# Altium PCB PCB1.PcbDoc
Units mm, origin at the board's own origin, x right, y up, seen from the top; angles counter-clockwise.
Board outline 151.89 x 92.35 mm, 2 copper layers (Top Layer, Bottom Layer); 104 components, 94 nets, 370 pads, 84 vias.
Unrouted connection lines stored in the file: 8.
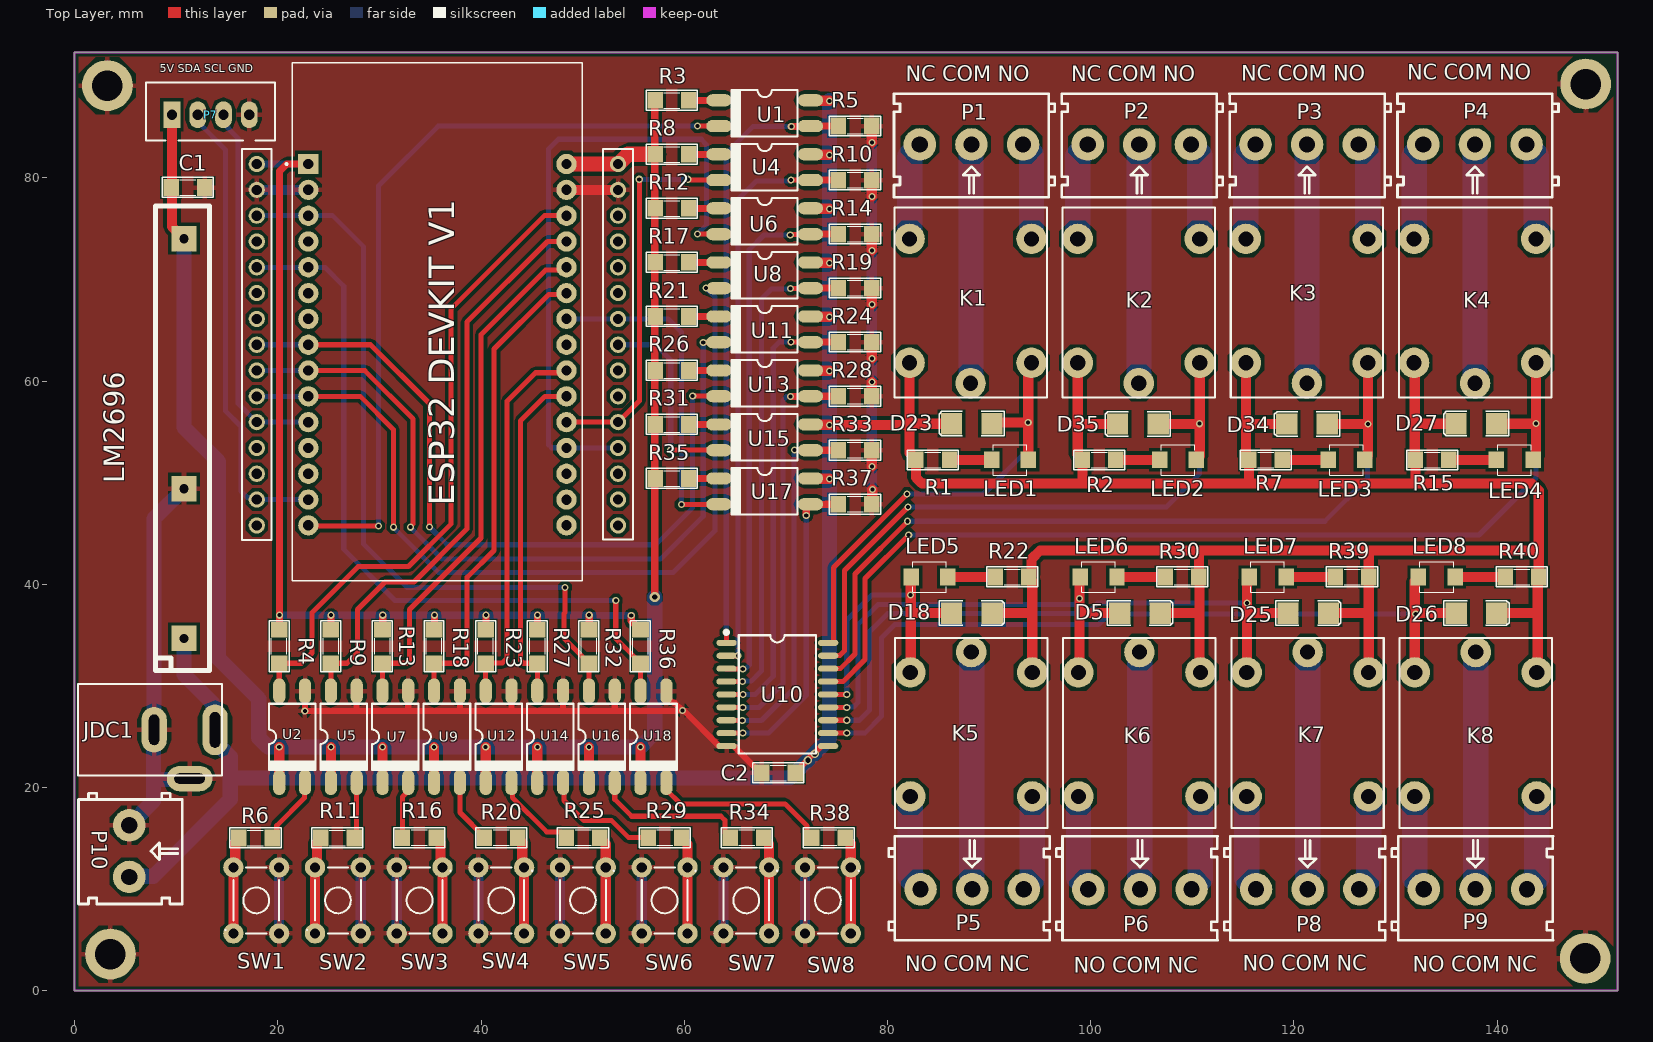
[diagram p0: Top Layer view]
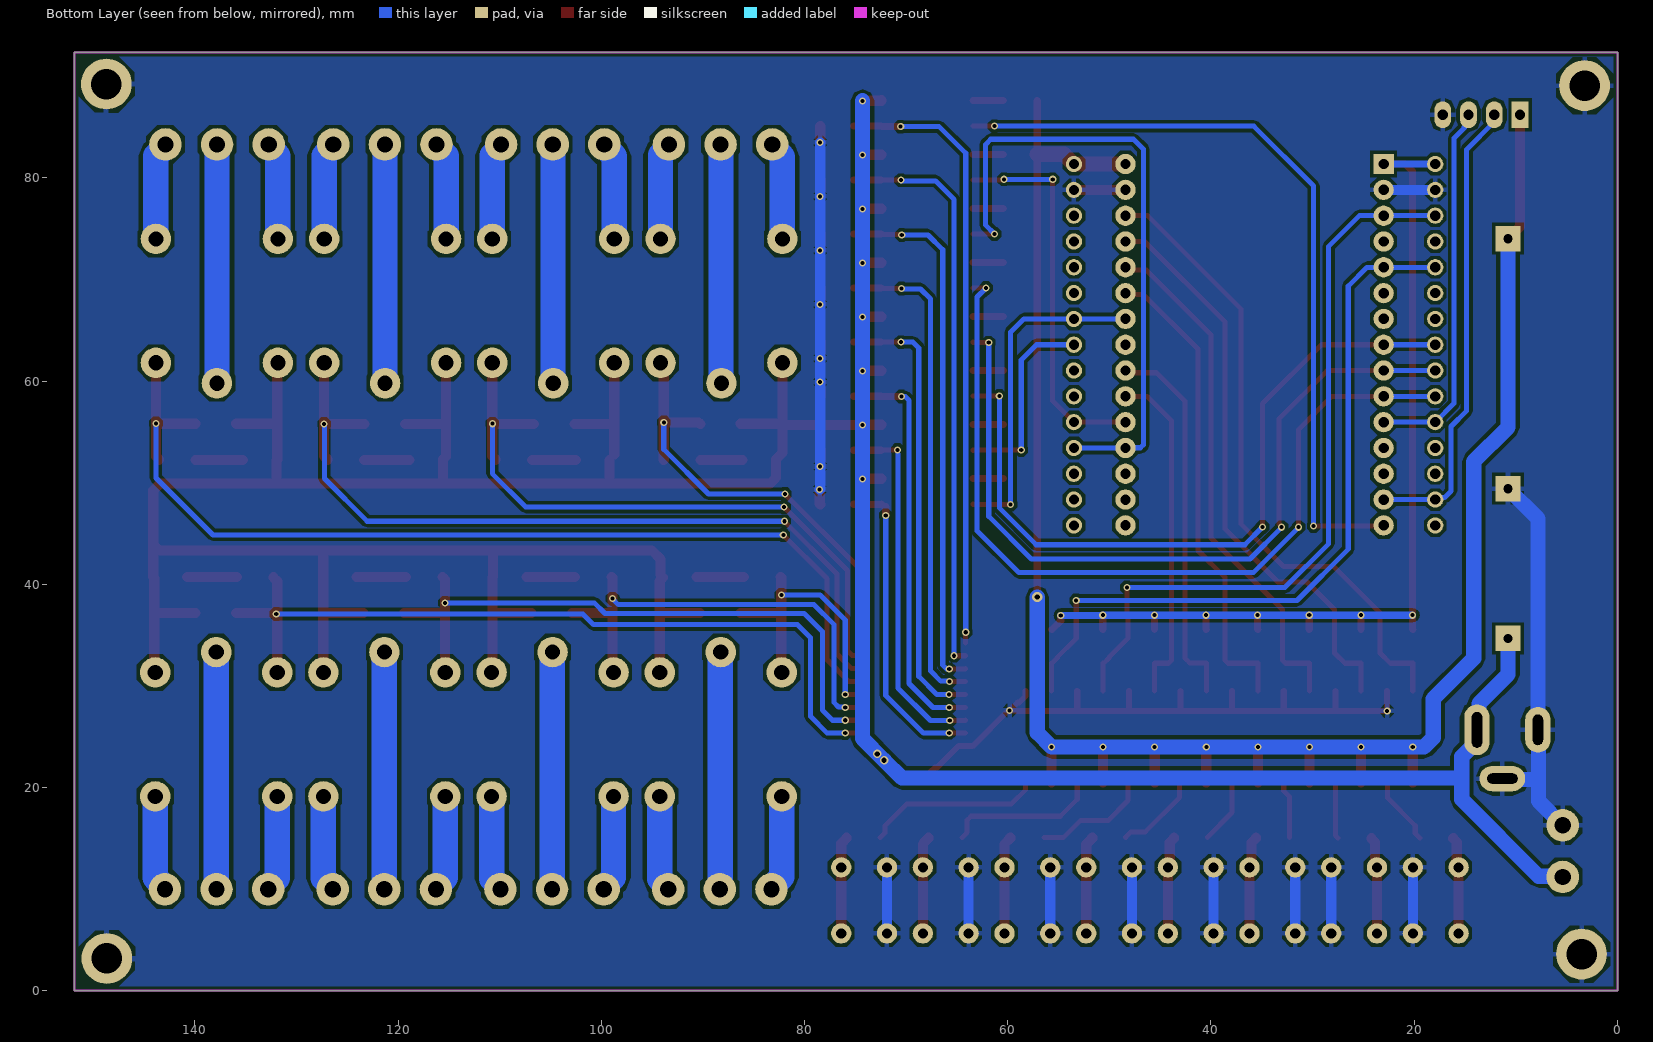
[diagram p1: Bottom Layer view, seen from below]
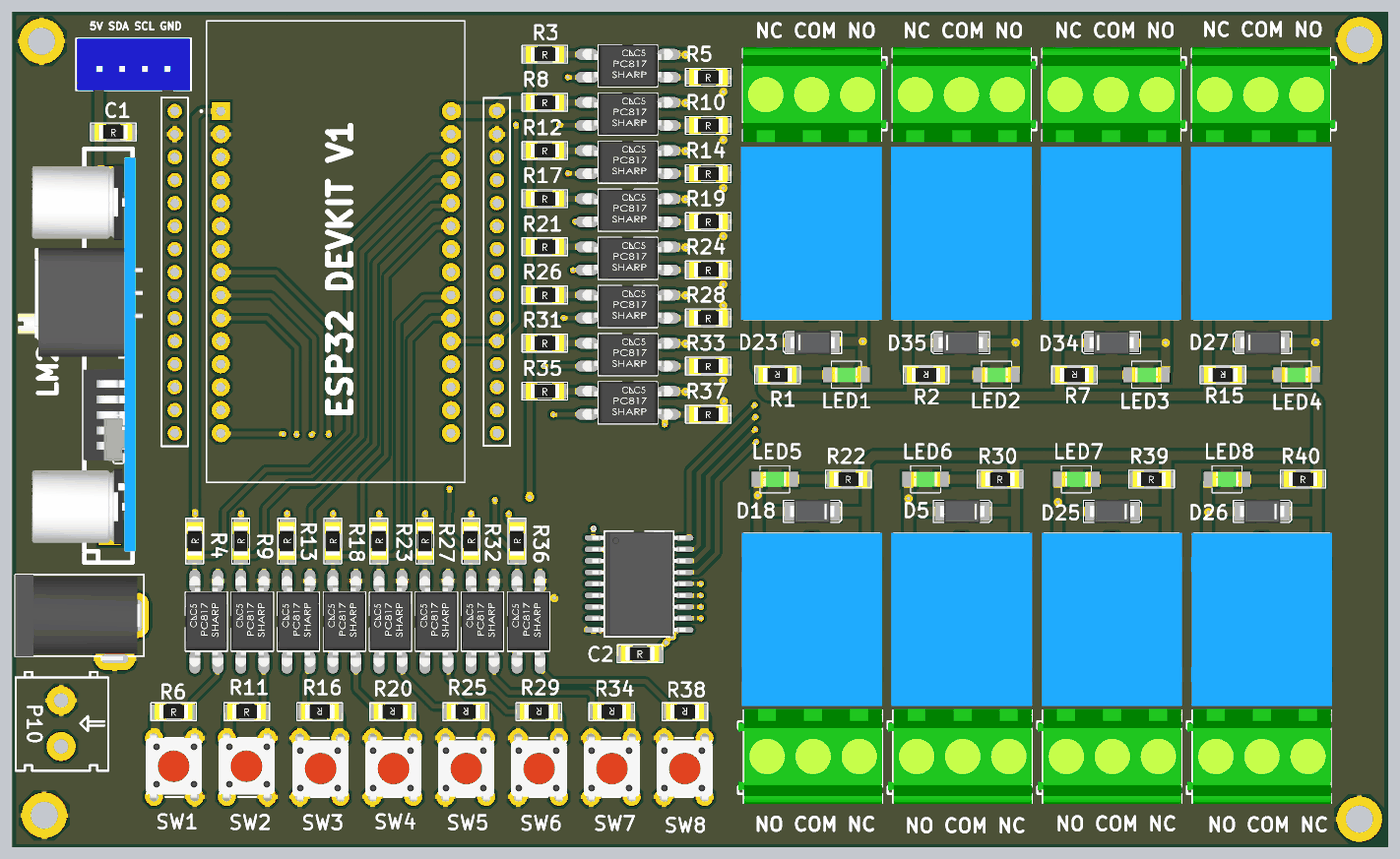
[diagram p2: 3D render of the assembled board from above, using the file's embedded part models]

## Layer stack, top to bottom
Top Solder: solder mask 0.0102, Solder Resist, Dk 3.5
Top Layer: signal copper 0.0356
Dielectric 1: dielectric 0.32, FR-4, Dk 4.8
Bottom Layer: signal copper 0.0356
Bottom Solder: solder mask 0.0102, Solder Resist, Dk 3.5

## Board outline
-0.025,0 -0.025,92.354 151.867,92.354 151.867,0

## Design rules (kind name [scope] priority, off if disabled: settings)
Clearance [All] p1: gap=0.3 ignorepadtopadclearanceinfootprint=FALSE
PlaneClearance [All] p1: clearance=0.5
PlaneConnect [All] p1: planeconnectstyle=Relief reliefexpansion=0.3 reliefentries=4 reliefconductorwidth=0.7 reliefairgap=0.3
PolygonConnect [All] p1: connectstyle=Relief reliefconductorwidth=0.5 reliefentries=4 polygonreliefangle="90 Angle" airgapwidth=0.3
RoutingCorners [All] p1: cornerstyle=45-Degree minsetback=1 maxsetback=2
RoutingVias [All] p1: holewidth=0.711 width=1.27 viastyle="Through Hole" minholewidth=0.711 minwidth=1.27 maxholewidth=0.711 maxwidth=1.27
SolderMaskExpansion [All] p1: expansion=0.102 istentingtop=FALSE
Width [All] p1: maxlimit=3 minlimit=0.5 preferedwidth=0.5
27 further rules are at their usual default settings.

## Components (designator, comment, footprint, x,y, rotation, side; value= is the part's Value field where it differs from the comment)
C1 "103" SM-1206 11.151,79.045 r0 top
C2 "103" SM-1206 69.266,21.438 r0 top
D5 "1N5819" diot_smd 106.914,37.186 r90 top (schematic designator D6)
D18 "1N5819" diot_smd 90.362,37.186 r90 top (schematic designator D5)
D23 "1N5819" diot_smd 86.244,55.778 r270 top (schematic designator D1)
D25 "1N5819" diot_smd 123.466,37.186 r90 top (schematic designator D7)
D26 "1N5819" diot_smd 140.019,37.186 r90 top (schematic designator D8)
D27 "1N5819" diot_smd 135.901,55.778 r270 top (schematic designator D4)
D34 "1N5819" diot_smd 119.239,55.753 r270 top (schematic designator D3)
D35 "1N5819" diot_smd 102.589,55.753 r270 top (schematic designator D2)
"ESP32 DEVKIT V1" "ESP32-DEVKIT-V1" MODULE_ESP32_DEVKIT_V1 35.712,65.841 r0 top (schematic designator U3)
JDC1 "Jac DC" DC-IN 0.323,21.179 r0 top
K1 "Relay12v" RELAY-10A5pin 88.175,67.742 r0 top
K2 "Relay12v" RELAY-10A5pin 104.728,67.742 r0 top
K3 "Relay12v" RELAY-10A5pin 121.28,67.742 r0 top
K4 "Relay12v" RELAY-10A5pin 137.832,67.742 r0 top
K5 "Relay12v" RELAY-10A5pin 88.245,25.376 r180 top
K6 "Relay12v" RELAY-10A5pin 104.798,25.376 r180 top
K7 "Relay12v" RELAY-10A5pin 121.35,25.376 r180 top
K8 "Relay12v" RELAY-10A5pin 137.902,25.376 r180 top
LED1 "LED_SMD" "SM-LED-GEEN 1206" 92.05,52.248 r0 top
LED2 "LED_SMD" "SM-LED-GEEN 1206" 108.61,52.248 r0 top
LED3 "LED_SMD" "SM-LED-GEEN 1206" 125.171,52.248 r0 top
LED4 "LED_SMD" "SM-LED-GEEN 1206" 141.732,52.248 r0 top
LED5 "LED_SMD" "SM-LED-GEEN 1206" 84.15,40.716 r180 top
LED6 "LED_SMD" "SM-LED-GEEN 1206" 100.787,40.716 r180 top
LED7 "LED_SMD" "SM-LED-GEEN 1206" 117.424,40.716 r180 top
LED8 "LED_SMD" "SM-LED-GEEN 1206" 134.061,40.716 r180 top
LM2696 "LM2596" module2596_DUNG 2.235,54.356 r270 top (schematic designator LM1)
P1 "KF128-3P" "con 3 kf128" 88.24,83.236 r180 top
P2 "KF128-3P" "con 3 kf128" 104.758,83.236 r180 top
P3 "KF128-3P" "con 3 kf128" 121.277,83.236 r180 top
P4 "KF128-3P" "con 3 kf128" 137.795,83.236 r180 top
P5 "KF128-3P" "con 3 kf128" 88.367,10.033 r0 top
P6 "KF128-3P" "con 3 kf128" 104.877,10.033 r0 top
P7 "Connector" JST-XH_B4B-XH-A 13.386,86.208 r0 top
P8 "KF128-3P" "con 3 kf128" 121.387,10.033 r0 top
P9 "KF128-3P" "con 3 kf128" 137.897,10.033 r0 top
P10 "KF128-3P" "con 2 kf128" 5.436,11.176 r270 top
R1 "1K" SM-1206 84.455,52.248 r180 top
R2 "1K" SM-1206 100.838,52.248 r180 top
R3 "1K" SM-1206 58.776,87.63 r0 top
R4 "4,7K" SM-1206 20.142,33.884 r90 top value=1K
R5 "1K" SM-1206 76.81,85.09 r0 top
R6 "220" SM-1206 17.805,15.037 r0 top value=1K
R7 "1K" SM-1206 117.221,52.248 r180 top
R8 "1K" SM-1206 58.776,82.314 r0 top
R9 "4,7K" SM-1206 25.222,33.884 r90 top value=1K
R10 "1K" SM-1206 76.81,79.774 r0 top
R11 "220" SM-1206 25.864,15.037 r0 top value=1K
R12 "1K" SM-1206 58.776,76.998 r0 top
R13 "4,7K" SM-1206 30.302,33.884 r90 top value=1K
R14 "1K" SM-1206 76.81,74.458 r0 top
R15 "1K" SM-1206 133.604,52.248 r180 top
R16 "220" SM-1206 33.924,15.062 r180 top value=1K
R17 "1K" SM-1206 58.776,71.682 r0 top
R18 "4,7K" SM-1206 35.382,33.884 r90 top value=1K
R19 "1K" SM-1206 76.81,69.142 r0 top
R20 "220" SM-1206 41.983,15.062 r180 top value=1K
R21 "1K" SM-1206 58.776,66.367 r0 top
R22 "1K" SM-1206 92.278,40.716 r0 top
R23 "4,7K" SM-1206 40.462,33.884 r90 top value=1K
R24 "1K" SM-1206 76.81,63.827 r0 top
R25 "220" SM-1206 50.042,15.062 r180 top value=1K
R26 "1K" SM-1206 58.776,61.051 r0 top
R27 "4,7K" SM-1206 45.542,33.884 r90 top value=1K
R28 "1K" SM-1206 76.81,58.511 r0 top
R29 "220" SM-1206 58.101,15.062 r180 top value=1K
R30 "1K" SM-1206 109,40.716 r0 top
R31 "1K" SM-1206 58.776,55.735 r0 top
R32 "4,7K" SM-1206 50.622,33.884 r90 top value=1K
R33 "1K" SM-1206 76.81,53.195 r0 top
R34 "220" SM-1206 66.16,15.062 r180 top value=1K
R35 "1K" SM-1206 58.776,50.419 r0 top
R36 "4,7K" SM-1206 55.702,33.884 r90 top value=1K
R37 "1K" SM-1206 76.81,47.879 r0 top
R38 "220" SM-1206 74.219,15.062 r180 top value=1K
R39 "1K" SM-1206 125.722,40.716 r0 top
R40 "1K" SM-1206 142.443,40.716 r0 top
SW1 "SW4" SW4 17.882,8.89 r270 top value="Button chip 4 pin"
SW2 "SW4" SW4 25.919,8.89 r270 top value="Button chip 4 pin"
SW3 "SW4" SW4 33.956,8.89 r90 top value="Button chip 4 pin"
SW4 "SW4" SW4 41.993,8.89 r90 top value="Button chip 4 pin"
SW5 "SW4" SW4 50.031,8.89 r90 top value="Button chip 4 pin"
SW6 "SW4" SW4 58.068,8.89 r90 top value="Button chip 4 pin"
SW7 "SW4" SW4 66.105,8.89 r90 top value="Button chip 4 pin"
SW8 "SW4" SW4 74.143,8.89 r90 top value="Button chip 4 pin"
U1 "PC817" PhotoCoupler_SMD 67.92,86.36 r0 top
U2 "PC817" PhotoCoupler_SMD 21.412,24.994 r90 top
U4 "PC817" PhotoCoupler_SMD 67.92,81.044 r0 top
U5 "PC817" PhotoCoupler_SMD 26.492,24.994 r90 top
U6 "PC817" PhotoCoupler_SMD 67.92,75.728 r0 top
U7 "PC817" PhotoCoupler_SMD 31.572,24.994 r90 top
U8 "PC817" PhotoCoupler_SMD 67.92,70.412 r0 top
U9 "PC817" PhotoCoupler_SMD 36.652,24.994 r90 top
U10 "ULN2803" SO-18 69.164,29.159 r0 top
U11 "PC817" PhotoCoupler_SMD 67.92,65.097 r0 top
U12 "PC817" PhotoCoupler_SMD 41.732,24.994 r90 top
U13 "PC817" PhotoCoupler_SMD 67.92,59.781 r0 top
U14 "PC817" PhotoCoupler_SMD 46.812,24.994 r90 top
U15 "PC817" PhotoCoupler_SMD 67.92,54.465 r0 top
U16 "PC817" PhotoCoupler_SMD 51.892,24.994 r90 top
U17 "PC817" PhotoCoupler_SMD 67.92,49.149 r0 top
U18 "PC817" PhotoCoupler_SMD 56.972,24.994 r90 top

## Footprints (in the part's own frame and the unit in brackets; to place one, negate y for a bottom-side part, rotate by r counter-clockwise, add the part's x,y. Pads: shape width x height; smd on the part's side, far side on the other; paste and mask are expansions set on the pad)
"con 2 kf128" [mm]
  round 3.2 hole 1.6 mask+0.102: 1(-5.105,-0.051) 2(-0.025,-0.051)
  silkscreen extent -8.25,-5.05 2.64,5.15
"con 3 kf128" [mm]
  round 3.2 hole 1.6 mask+0.102: 1(-5.105,-0.051) 2(-0.025,-0.051) 3(5.055,-0.051)
  silkscreen extent -8.25,-5.05 7.62,5.15, body extent -8.22,-5.2 7.62,5.3, height 14.85
DC-IN [mm] "Jac DC input"
  oval 2.5x5 hole 1 slot 3.5 at 90 deg: 1(13.5,4.5)
  oval 2.5x4.5 hole 1 slot 3 at 90 deg: 2(7.5,4.5)
  oval 4.5x2.5 hole 1 slot 3 at 0 deg: 3(11,-0.3)
  silkscreen extent 0,0 14.2,9, body extent 0,-0.5 13.83,9, height 11.02
diot_smd [mm]
  rect 2.1x2.1 smd: 1(-0.026,4.053) 2(-0.026,0.053)
  silkscreen extent -1.23,-1.15 1.18,5.26, body extent -1.3,-0.38 1.24,4.55, height 2.04
JST-XH_B4B-XH-A [mm] "JST; XH series; 4 circuit; 2.54 Pitch; Through-hole type; Top entry"
  rect 1.65x2.65 hole 1: 1(-3.81,0)
  oval 1.65x2.65 hole 1: 2(-1.27,0) 3(1.27,0) 4(3.81,0)
  silkscreen extent -6.35,-2.54 6.35,3.17, body extent -6.2,-2.57 6.2,3.18, height 7
module2596_DUNG [mm] "lm2596"
  rect 2.5x2.5 hole 0.914: 1(19.685,8.534) 2(4.953,8.534) 3(-19.66,8.534)
  silkscreen extent -22.86,5.71 22.86,11.05, body extent -21.88,-1.65 21.62,12.16, height 21.5
MODULE_ESP32_DEVKIT_V1 [mm]
  rect 2x2 / inner round 2 / far side rect 2x2 hole 1.02: 1(-12.7,15.515)
  round 2 hole 1.02: 2(-12.7,12.975) 3(-12.7,10.435) 4(-12.7,7.895) 5(-12.7,5.355) 6(-12.7,2.815) 7(-12.7,0.275) 8(-12.7,-2.265) 9(-12.7,-4.805) 10(-12.7,-7.345) 11(-12.7,-9.885) 12(-12.7,-12.425) 13(-12.7,-14.965) 14(-12.7,-17.505) 15(-12.7,-20.045) 16(12.7,-20.045) 17(12.7,-17.505) 18(12.7,-14.965) 19(12.7,-12.425) 20(12.7,-9.885) 21(12.7,-7.345) 22(12.7,-4.805) 23(12.7,-2.265) 24(12.7,0.275) 25(12.7,2.815) 26(12.7,5.355) 27(12.7,7.895) 28(12.7,10.435) 29(12.7,12.975) 30(12.7,15.515)
  silkscreen extent -14.95,-25.48 14.23,25.48
PhotoCoupler_SMD [mm]
  oval 2.5x1.2 smd: 1(-4.5,1.27) 2(-4.5,-1.27) 3(4.5,-1.27) 4(4.5,1.27)
  silkscreen extent -3.25,-2.29 3.25,2.32, body extent -5,-2.28 5,2.3, height 3.91
RELAY-10A5pin [mm]
  round 3 hole 1.5: 1(0,-7.95) 2(-6,6.25) 3(6,6.25) 4(-6,-5.95) 5(6,-5.95)
  silkscreen extent -7.49,-9.35 7.51,9.35, body extent -7.75,-9.4 7.75,9.7, height 17.3
SM-1206 [mil] "Compoment SMD 120x60mil"
  rect 60x65 smd: 1(-65,0) 2(65,0)
  silkscreen extent -99,-38 99,39, body extent -83,-35 83,36, height 25
"SM-LED-GEEN 1206" [mil] "Compoment SMD 120x60mil"
  rect 60x65 smd: 1(-71,0) 2(71,0)
  silkscreen extent -65,-59 65,59, body extent -63,-32 63,31, height 44
SO-18 [mm] "SOIC, 18-Leads, Body 9.9x3.9mm, Pitch 1.27mm, IPC Medium Density"
  oval 2x0.6 smd: 1(-5,5.08) 2(-5,3.81) 3(-5,2.54) 4(-5,1.27) 5(-5,0) 6(-5,-1.27) 7(-5,-2.54) 8(-5,-3.81) 9(-5,-5.08) 10(5,-5.08) 11(5,-3.81) 12(5,-2.54) 13(5,-1.27) 14(5,0) 15(5,1.27) 16(5,2.54) 17(5,3.81) 18(5,5.08)
  silkscreen extent -5.3,-5.82 3.8,6.4, body extent -5.15,-5.77 5.15,5.76, height 2.65
SW4 [mm] "SW button 4pin, 250 x250 mil"
  round 2 hole 1: 1(-3.25,2.25) 2(3.25,2.25) 3(3.25,-2.25) 4(-3.25,-2.25)
  silkscreen extent -3.25,-3.05 3.25,2.25, body extent -4.08,-3.18 3.82,3.02, height 7

## Part data
C1 C2: library part CM, "Cap SMD"
"ESP32 DEVKIT V1": "Dual core, Wi-Fi: 2.4 GHz up to 150 Mbits/s,BLE (Bluetooth Low Energy) and legacy Bluetooth, 32 bits, Up to 240 MHz", Package=None, Availability="Not in stock", Check_prices=https://www.snapeda.com/parts/ESP32-DEVKIT-V1/Do+it/view-part/?ref=eda, MF="Do it", MP=ESP32-DEVKIT-V1, Price=None, SnapEDA_Link=https://www.snapeda.com/parts/ESP32-DEVKIT-V1/Do+it/view-part/?ref=snap
JDC1: library part DCIN, "Jac DC input"
K1 K2 K3 K4 K5 K6 K7 K8: library part Relay-SRD-05VDC-SL-C1, "SRD-05VDC-SL-C1", LatestRevisionDate=17-Jul-2002, LatestRevisionNote="Re-released for DXP Platform.", PackageReference=DIP-P8, Published=24-Mar-1999, Publisher="Altium Limited"
LM2696: library part "LM2596 module_dung"
P1 P2 P3 P4 P5 P6 P8 P9: library part "Con 3 KF128", "Cắm", Chung_Loai=Cắm, Don_Vi=Con, Ma_Hang=MH000983, So_Chan=3, Ten_Linh_Kien="CON3 KF128-3P 5.08MM"
P7: library part Connector_4pin
P10: library part "Con 2 KF128", "Cắm", Chung_Loai=Cắm, Don_Vi=Con, Ma_Hang=MH000983, So_Chan=3, Ten_Linh_Kien="CON3 KF128-3P 5.08MM"
R1 R2 R3 R4 R5 R6 R7 R8 R9 R10 R11 R12 R13 R14 R15 R16 R17 R18 R19 R20 R21 R22 R23 R24 R25 R26 R27 R28 R29 R30 R31 R32 R33 R34 R35 R36 R37 R38 R39 R40: library part RM, "Resistor SMD"
SW1 SW2 SW3 SW4 SW5 SW6 SW7 SW8: "Switch button 4 pin"
U1 U2 U4 U5 U6 U7 U8 U9 U11 U12 U13 U14 U15 U16 U17 U18: "4-Pin Phototransistor Optocoupler", DatasheetVersion=Nov-2003, LatestRevisionDate=04-Mar-2005, LatestRevisionNote="Sch pins 3 & 4 Swapped.", PackageReference=DIP-4, Published=24-Mar-1999, Publisher="Altium Limited"
U10: "ULN2803A Darlington Transistor Arrays"

## Free pads (board coordinates)
  round 5 hole 3: 1(3.226,89.078) 2(148.717,89.23) 3(148.666,3.175) 4(3.531,3.607)
  round 1.6 hole 1: 5(17.932,81.356) 6(53.492,81.356) 7(17.932,45.796) 8(53.492,45.796) 9(17.932,78.816) 10(17.932,76.276) 11(17.932,73.736) 12(17.932,71.196) 13(17.932,68.656) 14(17.932,66.116) 15(17.932,63.576) 16(17.932,61.036) 17(17.932,58.496) 18(17.932,55.956) 19(17.932,53.416) 20(17.932,50.876) 21(17.932,48.336) 22(53.492,78.816) 23(53.492,76.276) 24(53.492,73.736) 25(53.492,71.196) 26(53.492,68.656) 27(53.492,66.116) 28(53.492,63.576) 29(53.492,61.036) 30(53.492,58.496) 31(53.492,55.956) 32(53.492,53.416) 33(53.492,50.876) 34(53.492,48.336)

## Via types
v1: diameter 0.7, hole 0.4, Top Layer to Bottom Layer, 81 vias
v2: diameter 0.8, hole 0.5, Top Layer to Bottom Layer, 2 vias
v3: diameter 1, hole 0.5, Top Layer to Bottom Layer, 1 vias

## Nets (pads, with @x,y where several pads share a name; then routed paths per layer and width w, separated by ;. In a path a pad name is that pad's centre, name@x,y a point inside that pad or via, vN(x,y) a via of type N, cw(c..) or ccw(c..) an arc to the next point about the centre after c; other vN are vias at no path point)
5v: "ESP32 DEVKIT V1.30" C1.1 LM2696.3 P7.1 pad.6 R3.1 R8.1 R12.1 R17.1 R21.1 R26.1 R31.1 R35.1 U2.1 U5.1 U7.1 U9.1 U12.1 U14.1 U16.1 U18.1 | length 211.7
  Top Layer w0.7: v3(57.099,38.735) R35.1@57.099,50.394 ; R35.1 R35.1@57.099,50.394 ; R31.1 57.099,55.709 57.099,54.236 ; R26.1 57.099,61.025 57.099,59.552 ; R21.1 57.099,66.341 57.099,64.868 ; R17.1 57.099,71.657 57.099,70.184 ; R12.1 57.099,76.973 57.099,75.5 ; R3.1 57.099,87.605 57.099,75.5 ; R35.1@57.099,50.394 57.099,54.236 ; 57.099,54.236 57.099,59.552 ; 57.099,59.552 57.099,64.868 ; 57.099,64.868 57.099,70.184 ; 57.099,70.184 57.099,75.5
  Top Layer w1: P7.1 9.576,75.209 LM2696.3 ; U2.1 v1(20.142,23.982) ; U5.1 v1(25.222,24.003) ; U7.1 v1(30.302,24.003) ; U9.1 v1(35.382,24.003) ; U12.1 v1(40.462,24.003) ; U14.1 v1(45.542,24.003) ; U16.1 v1(50.622,24.003) ; U18.1 v1(55.702,24.003)
  Top Layer w1.5: 48.412,81.356 pad.6 ; pad.6@53.512,81.375 54.45,82.314 R8.1
  Bottom Layer w1.5: LM2696.3 10.77,55.448 14.148,52.07 14.148,32.69 18.136,28.702 18.136,24.892 19.046,23.982 v1(20.142,23.982) 25.222,23.982 30.302,23.982 35.382,23.982 40.462,23.982 45.542,23.982 50.622,23.982 55.681,23.982 57.099,25.4 v3(57.099,38.735)
+3V3: "ESP32 DEVKIT V1.1" pad.5 R4.2 R9.2 R13.2 R18.2 R23.2 R27.2 R32.2 R36.2 | length 98.4
  Top Layer w0.7: R4.2 20.168,35.56 v1(20.168,36.957) 20.168,80.645 20.879,81.356 23.012,81.356 ; R9.2 25.248,35.56 v1(25.248,36.957) ; R13.2 30.328,35.56 v1(30.328,36.957) ; R18.2 35.408,35.56 v1(35.408,36.957) ; R23.2 40.488,35.56 v1(40.488,36.957) ; R27.2 45.568,35.56 v1(45.568,36.957) ; R32.2 50.648,35.56 v1(50.648,36.957) ; v1(54.788,36.932) 54.788,36.385 55.639,35.535 R36.2
  Bottom Layer w0.7: pad.5 23.012,81.356 ; v1(20.168,36.957) v1(25.248,36.957) v1(30.328,36.957) v1(35.408,36.957) v1(40.488,36.957) v1(45.568,36.957) v1(50.648,36.957) 50.673,36.932 v1(54.788,36.932)
BT1: "ESP32 DEVKIT V1.28" pad.23 R4.1 U2.4 | length 64
  Top Layer w0.5: U2.4 R4.1 22.352,32.233 23.368,33.249 23.368,37.211 27.915,41.758 32.868,41.758 37.059,45.949 37.059,67.107 46.228,76.276 48.412,76.276
BT2: "ESP32 DEVKIT V1.27" pad.24 R9.1 U5.4 | length 57.6
  Top Layer w0.5: U5.4 R9.1 26.822,32.233 27.838,33.249 27.838,37.516 30.556,40.234 33.401,40.234 38.608,45.441 38.608,65.811 46.533,73.736 48.412,73.736
BT3: "ESP32 DEVKIT V1.26" pad.25 R13.1 U7.4 | length 51.6
  Top Layer w0.5: U7.4 R13.1 32.676,32.233 32.969,32.525 32.969,37.516 40.005,44.552 40.005,64.567 46.355,70.917 48.133,70.917 48.412,71.196
BT4: "ESP32 DEVKIT V1.25" pad.26 R18.1 U9.4 | length 47.2
  Top Layer w0.5: U9.4 R18.1 38.341,32.233 38.633,32.525 38.633,40.691 41.275,43.332 41.275,63.144 46.66,68.529 48.285,68.529 48.412,68.656
BT5: "ESP32 DEVKIT V1.22" pad.29 R23.1 U12.4 | length 37.4
  Top Layer w0.5: U12.4 R23.1 40.5,32.271 42.1,32.271 42.57,32.741 42.57,58.039 45.351,60.82 48.196,60.82 48.412,61.036
BT6: "ESP32 DEVKIT V1.21" pad.30 R27.1 U14.4 | length 33.6
  Top Layer w0.5: U14.4 R27.1 44.184,32.233 43.891,32.525 43.891,56.083 46.304,58.496 48.412,58.496
BT7: "ESP32 DEVKIT V1.3" pad.10 R32.1 U16.4 | length 73.9
  Top Layer w0.5: v1(48.26,39.675) 48.26,37.209 48.158,37.108 48.158,34.696 50.047,32.808 50.047,32.745 50.559,32.233 R32.1 U16.4
  Bottom Layer w0.5: pad.10 25.403,76.276 28.423,73.257 28.423,43.993 32.741,39.675 v1(48.26,39.675)
BT8: "ESP32 DEVKIT V1.5" pad.12 R36.1 U18.4 | length 74
  Top Layer w0.5: v1(53.264,38.405) 53.264,34.671 55.127,32.808 55.127,32.745 55.639,32.233 R36.1 U18.4
  Bottom Layer w0.5: pad.12 24.638,71.196 26.492,69.342 26.492,43.459 31.547,38.405 v1(53.264,38.405)
GND: "ESP32 DEVKIT V1.2" "ESP32 DEVKIT V1.29" C1.2 C2.1 JDC1.2 JDC1.3 LM2696.2 P7.4 P10.1 pad.1 pad.2 pad.3 pad.4 pad.9 pad.22 R5.2 R10.2 R14.2 R19.2 R24.2 R28.2 R33.2 R37.2 SW1.1 SW1.2 SW2.1 SW2.2 SW3.1 SW3.2 SW4.1 SW4.2 SW5.1 SW5.2 SW6.1 SW6.2 SW7.1 SW7.2 SW8.1 SW8.2 U2.3 U5.3 U7.3 U9.3 U10.9 U12.3 U14.3 U16.3 U18.3 | length 211.8
  Top Layer w0.6: U2.3 22.669,29.481 22.669,27.546 v1(22.657,27.534) 27.711,27.534 ; U5.3 27.762,27.584 27.711,27.534 ; U7.3 32.842,27.584 32.893,27.534 ; U9.3 37.922,27.559 37.948,27.534 ; U12.3 43.002,27.534 ; U14.3 48.082,27.559 48.057,27.534 ; U16.3 53.162,27.686 53.01,27.534 ; U18.3 58.242,29.006 58.883,28.365 59.036,28.365 v1(59.817,27.584) ; C2.1 67.615,21.501 67.153,21.963 66.98,21.963 64.864,24.079 63.464,24.079 59.978,27.565 59.836,27.565 v1(59.817,27.584) ; 27.711,27.534 32.893,27.534 ; 32.893,27.534 37.948,27.534 ; 37.948,27.534 43.002,27.534 ; 43.002,27.534 48.057,27.534 ; 48.057,27.534 53.01,27.534 ; 53.01,27.534 59.254,27.534 59.285,27.565 59.798,27.565 v1(59.817,27.584)
  Top Layer w1: 48.412,78.816 pad.22 ; R37.2 78.511,47.93 v1(78.511,49.327) ; v1(78.461,51.595) R33.2 ; R28.2 v1(78.461,59.893) ; v1(78.461,62.226) R24.2 ; v1(78.461,67.542) R19.2 ; v1(78.461,72.858) R14.2 ; v1(78.461,78.174) R10.2 ; v1(78.461,83.49) R5.2
  Bottom Layer w1: pad.9 23.012,78.816 ; SW1.2 SW1.1 ; SW2.2 SW2.1 ; SW3.1 SW3.2 ; SW4.1 SW4.2 ; SW5.1 SW5.2 ; SW6.1 SW6.2 ; SW7.1 SW7.2 ; SW8.1 SW8.2 ; v1(78.461,83.49) v1(78.461,78.174) v1(78.461,72.858) v1(78.461,67.542) 78.461,49.378 v1(78.511,49.327)
  Bottom Layer w1.5: P10.1 7.772,18.669 7.772,20.777 ; LM2696.2 7.823,46.457 JDC1.2 7.772,25.629 7.772,20.777 ; JDC1.3 11.221,20.777 7.772,20.777
NetD1_1: D23.1 K1.5 LED1.2 U10.18 | length 47.9
  Top Layer w0.5: U10.18 74.655,34.239 74.701,34.285 74.701,41.656 v1(81.94,48.895)
  Top Layer w1: D23.1@90.272,55.778 D23.1 90.424,55.931 v1(93.853,55.931) ; LED1.2 v1(93.853,55.931) ; K1.5 93.853,61.47 v1(93.853,55.931)
  Bottom Layer w0.5: v1(81.94,48.895) 89.459,48.895 93.853,53.289 v1(93.853,55.931)
NetD2_1: D35.1 K2.5 LED2.2 U10.17 | length 67.3
  Top Layer w0.5: U10.17 74.183,32.988 75.305,32.988 75.768,33.452 75.768,41.351 v1(82.017,47.6)
  Top Layer w1: D35.1 110.702,55.778 v1(110.728,55.804) ; LED2.2 110.414,52.311 110.728,52.625 v1(110.728,55.804) ; K2.5 v1(110.728,55.804)
  Bottom Layer w0.5: v1(82.017,47.6) 107.442,47.6 110.728,50.885 v1(110.728,55.804)
NetD3_1: D34.1 K3.5 LED3.2 U10.16 | length 84.5
  Top Layer w0.5: U10.16 75.362,31.699 76.81,33.147 76.81,41.021 v1(81.991,46.203)
  Top Layer w1: D34.1 v1(127.28,55.778) ; LED3.2 126.975,52.311 127.28,52.617 v1(127.28,55.778) ; K3.5 v1(127.28,55.778)
  Bottom Layer w0.5: v1(81.991,46.203) 123.038,46.203 127.254,50.419 127.254,55.753 v1(127.28,55.778)
NetD4_1: D27.1 K4.5 LED4.2 U10.15 | length 101.6
  Top Layer w0.5: U10.15 75.641,30.429 77.8,32.588 77.8,40.564 v1(82.093,44.856)
  Top Layer w1: D27.1 143.807,55.804 v1(143.832,55.829) ; LED4.2 143.535,52.311 143.832,52.608 v1(143.832,55.829) ; K4.5 v1(143.832,55.829)
  Bottom Layer w0.5: v1(82.093,44.856) 138.227,44.856 143.832,50.462 v1(143.832,55.829)
NetD5_1: D18.1 K5.5 LED5.2 U10.14 | length 29.9
  Top Layer w0.5: U10.14 v1(75.997,29.159)
  Top Layer w1: K5.5 82.296,31.377 82.296,37.109 ; LED5.2 82.296,40.665 82.296,37.109 ; D18.1 82.347,37.16 82.296,37.109
  Bottom Layer w0.5: v1(75.997,29.159) 75.997,36.474 78.461,38.938 v1(82.271,38.938)
NetD6_1: D5.1 K6.5 LED6.2 U10.13 | length 47.1
  Top Layer w0.5: U10.13 v1(75.997,27.889)
  Top Layer w1: K6.5 98.908,31.436 98.908,37.16 ; LED6.2 98.908,40.64 v1(98.908,38.583) 98.908,37.16 ; D5.1 98.908,37.16
  Bottom Layer w0.5: v1(75.997,27.889) 76.035,27.927 76.67,27.927 77.089,28.346 77.089,36.017 79.07,37.998 98.323,37.998 v1(98.908,38.583)
NetD7_1: D25.1 K7.5 LED7.2 U10.12 | length 64
  Top Layer w0.5: U10.12 v1(75.997,26.619)
  Top Layer w1: K7.5 115.392,31.369 115.392,37.16 ; LED7.2 115.392,40.488 v1(115.392,38.176) 115.392,37.245 115.477,37.16 D25.1
  Bottom Layer w0.5: v1(75.997,26.619) 77.241,26.619 78.232,27.61 78.232,35.331 80.035,37.135 99.644,37.135 100.686,38.176 v1(115.392,38.176)
NetD8_1: D26.1 K8.5 LED8.2 U10.11 | length 80.9
  Top Layer w0.5: U10.11 v1(75.997,25.349)
  Top Layer w1: K8.5 v1@131.902,36.982 ; LED8.2 132.258,40.653 131.902,40.297 v1@131.902,36.982 ; D26.1 132.08,37.16 v1(131.991,37.071) v1@131.902,36.982
  Bottom Layer w0.5: v1(75.997,25.349) 77.775,25.349 79.426,27 79.426,34.747 80.721,36.043 100.787,36.043 101.816,37.071 v1(131.991,37.071)
NetK1_1: K1.1 P1.2 | length 23.5
  Bottom Layer w2.5: K1.1 88.22,59.837 88.22,83.242 P1.2
NetK1_2: K1.2 P1.3 | length 9.7
  Bottom Layer w2.5: K1.2 82.175,82.087 83.185,83.097 P1.3
NetK1_3: K1.3 P1.1 | length 9.6
  Bottom Layer w2.5: P1.1 93.345,83.097 94.175,82.267 K1.3
NetK2_1: K2.1 P2.2 | length 23.5
  Bottom Layer w2.5: K2.1 104.755,59.82 104.755,83.259 P2.2
NetK2_2: K2.2 P2.3 | length 9.7
  Bottom Layer w2.5: K2.2 98.728,82.121 99.703,83.097 P2.3
NetK2_3: K2.3 P2.1 | length 9.7
  Bottom Layer w2.5: P2.1 109.863,83.097 110.728,82.233 K2.3
NetK3_1: K3.1 P3.2 | length 23.5
  Bottom Layer w2.5: K3.1 121.291,59.803 121.291,83.276 P3.2
NetK3_2: K3.2 P3.3 | length 9.7
  Bottom Layer w2.5: K3.2 115.28,82.155 116.222,83.097 P3.3
NetK3_3: K3.3 P3.1 | length 9.7
  Bottom Layer w2.5: P3.1 126.382,83.097 127.28,82.199 K3.3
NetK4_1: K4.1 P4.2 | length 23.5
  Bottom Layer w2.5: P4.2 137.826,83.281 137.826,59.798 K4.1
NetK4_2: K4.2 P4.3 | length 9.7
  Bottom Layer w2.5: K4.2 131.832,82.189 132.74,83.097 P4.3
NetK4_3: K4.3 P4.1 | length 9.7
  Bottom Layer w2.5: P4.1 142.9,83.097 143.832,82.165 K4.3
NetK5_1: K5.1 P5.2 | length 23.4
  Bottom Layer w2.5: K5.1 88.293,33.278 88.293,10.03 P5.2
NetK5_2: K5.2 P5.3 | length 9.5
  Bottom Layer w2.5: P5.3 93.421,10.172 94.245,10.996 K5.2
NetK5_3: K5.3 P5.1 | length 9.6
  Bottom Layer w2.5: K5.3 82.245,11.188 83.261,10.172 P5.1
NetK6_1: K6.1 P6.2 | length 23.4
  Bottom Layer w2.5: K6.1 104.824,33.299 104.824,10.009 P6.2
NetK6_2: K6.2 P6.3 | length 9.5
  Bottom Layer w2.5: P6.3 109.931,10.172 110.798,11.038 K6.2
NetK6_3: K6.3 P6.1 | length 9.5
  Bottom Layer w2.5: K6.3 98.798,11.145 99.771,10.172 P6.1
NetK7_1: K7.1 P8.2 | length 23.3
  Bottom Layer w2.5: K7.1 121.356,33.321 121.356,9.988 P8.2
NetK7_2: K7.2 P8.3 | length 9.5
  Bottom Layer w2.5: P8.3 126.441,10.172 127.35,11.08 K7.2
NetK7_3: K7.3 P8.1 | length 9.5
  Bottom Layer w2.5: K7.3 115.35,11.103 116.281,10.172 P8.1
NetK8_1: K8.1 P9.2 | length 23.4
  Bottom Layer w2.5: P9.2 137.887,9.998 137.887,33.311 K8.1
NetK8_2: K8.2 P9.3 | length 9.5
  Bottom Layer w2.5: P9.3 142.951,10.172 143.902,11.123 K8.2
NetK8_3: K8.3 P9.1 | length 9.5
  Bottom Layer w2.5: K8.3 131.902,11.061 132.791,10.172 P9.1
NetLED1_1: LED1.1 R1.1 | length 4.1
  Top Layer w1: R1.1 LED1.1
NetLED2_1: LED2.1 R2.1 | length 4.3
  Top Layer w1: R2.1 LED2.1
NetLED3_1: LED3.1 R7.1 | length 4.5
  Top Layer w1: R7.1 LED3.1
NetLED4_1: LED4.1 R15.1 | length 4.7
  Top Layer w1: R15.1 LED4.1
NetLED5_1: LED5.1 R22.1 | length 4.7
  Top Layer w1: LED5.1 R22.1
NetLED6_1: LED6.1 R30.1 | length 4.8
  Top Layer w1: LED6.1 R30.1
NetLED7_1: LED7.1 R39.1 | length 4.8
  Top Layer w1: LED7.1 R39.1
NetLED8_1: LED8.1 R40.1 | length 4.9
  Top Layer w1: LED8.1 R40.1
NetR3_2: R3.2 U1.1 | length 3
  Top Layer w0.7: R3.2 U1.1
NetR5_1: R5.1 U1.3 U10.1 | length 60.3
  Top Layer w0.5: v1(64.135,35.281) 64.15,35.266 64.15,34.254 U10.1
  Top Layer w0.7: v1(70.536,85.039) 72.369,85.039 U1.3 R5.1
  Bottom Layer w0.5: v1(64.135,35.281) 64.135,82.423 66.751,85.039 v1(70.536,85.039)
NetR6_1: R6.1 SW1.3 SW1.4 | length 9.6
  Top Layer w1: SW1.3 SW1.4 15.821,12.33 15.821,14.64 16.154,14.973 R6.1
NetR6_2: R6.2 U2.2 | length 6.8
  Top Layer w0.5: R6.2 19.899,15.48 19.899,16.242 22.637,18.98 22.637,20.449 U2.2
NetR8_2: R8.2 U4.1 | length 3
  Top Layer w0.7: R8.2 U4.1
NetR10_1: R10.1 U4.3 U10.2 | length 56.8
  Top Layer w0.5: U10.2 v1(65.278,32.969) ; v1@70.434,79.698 v1(70.51,79.774) U4.3
  Top Layer w0.7: U4.3 R10.1
  Bottom Layer w0.5: v1(65.278,32.969) 65.278,77.876 67.1,79.698 v1@70.51,79.698
NetR11_1: R11.1 SW2.3 SW2.4 | length 9.6
  Top Layer w1: SW2.3 SW2.4 23.86,12.331 23.86,14.62 24.213,14.973 R11.1
NetR11_2: R11.2 U5.2 | length 5.6
  Top Layer w0.5: R11.2 27.762,15.284 U5.2
NetR12_2: R12.2 U6.1 | length 3
  Top Layer w0.7: R12.2 U6.1
NetR14_1: R14.1 U6.3 U10.3 | length 52.7
  Top Layer w0.5: U10.3 64.183,31.68 65.729,31.68 v1(65.761,31.648) ; v1(70.434,74.382) 70.472,74.42 72.382,74.42 U6.3
  Top Layer w0.7: U6.3 R14.1
  Bottom Layer w0.5: v1(65.761,31.648) 65.799,31.687 66.041,31.687 66.396,32.041 66.396,72.923 67.854,74.382 v1(70.434,74.382)
NetR16_1: R16.1 SW3.3 SW3.4 | length 9.7
  Top Layer w1: R16.1 35.575,14.999 36.015,14.558 36.015,12.331 SW3.3 SW3.4
NetR16_2: R16.2 U7.2 | length 5.7
  Top Layer w0.5: R16.2 32.273,19.084 32.842,19.654 U7.2
NetR17_2: R17.2 U8.1 | length 3
  Top Layer w0.7: R17.2 U8.1
NetR19_1: R19.1 U8.3 U10.4 | length 48.5
  Top Layer w0.5: U10.4 v1(65.735,30.429) ; v1(70.472,69.104) 70.491,69.123 72.401,69.123 U8.3
  Top Layer w0.7: U8.3 R19.1
  Bottom Layer w0.5: v1(65.735,30.429) 65.773,30.467 66.586,30.467 67.589,31.471 67.589,68.072 68.584,69.066 v1@70.472,69.066
NetR20_1: R20.1 SW4.3 SW4.4 | length 9.7
  Top Layer w1: R20.1 43.634,14.999 44.052,14.58 44.052,12.331 SW4.3 SW4.4
NetR20_2: R20.2 U9.2 | length 6.4
  Top Layer w0.5: U9.2 37.922,17.535 40.332,15.126 R20.2
NetR21_2: R21.2 U11.1 | length 3
  Top Layer w0.7: R21.2 U11.1
NetR24_1: R24.1 U10.5 U11.3 | length 44.4
  Top Layer w0.5: U10.5 v1(65.786,29.159) ; v1@70.434,63.75 v1(70.51,63.827) U11.3
  Top Layer w0.7: U11.3 R24.1
  Bottom Layer w0.5: v1(65.786,29.159) 66.98,29.159 68.758,30.937 68.758,63.246 69.338,63.827 v1(70.51,63.827)
NetR25_1: R25.1 SW5.3 SW5.4 | length 9.7
  Top Layer w1: R25.1 51.693,14.999 52.281,14.411 SW5.3 SW5.4
NetR25_2: R25.2 U12.2 | length 8.5
  Top Layer w0.5: U12.2 43.085,20.41 43.085,19.018 46.465,15.638 47.879,15.638 48.391,15.126 R25.2
NetR26_2: R26.2 U13.1 | length 3
  Top Layer w0.7: R26.2 U13.1
NetR28_1: R28.1 U10.6 U13.3 | length 40
  Top Layer w0.5: U10.6 64.177,27.877 65.748,27.877 v1(65.761,27.864)
  Top Layer w0.7: v1(70.472,58.473) 72.382,58.473 U13.3 R28.1
  Bottom Layer w0.5: v1(65.761,27.864) 67.361,27.864 69.723,30.226 69.723,58.103 70.092,58.473 v1(70.472,58.473)
NetR29_1: R29.1 SW6.3 SW6.4 | length 9.7
  Top Layer w1: R29.1 59.752,14.999 60.318,14.432 SW6.3 SW6.4
NetR29_2: R29.2 U14.2 | length 11.6
  Top Layer w0.5: U14.2 48.165,20.41 48.165,18.713 50.14,16.739 52.857,16.739 54.534,15.062 R29.2
NetR31_2: R31.2 U15.1 | length 3
  Top Layer w0.7: R31.2 U15.1
NetR33_1: R33.1 U10.7 U15.3 | length 35.4
  Top Layer w0.5: U10.7 64.177,26.607 65.697,26.607 v1(65.71,26.594) ; v1(70.841,53.213) 70.85,53.204 72.411,53.204 U15.3
  Top Layer w0.7: U15.3 R33.1
  Bottom Layer w0.5: v1(65.71,26.594) 67.615,26.594 70.815,29.794 70.815,52.836
NetR34_1: R34.1 SW7.3 SW7.4 | length 9.6
  Top Layer w1: R34.1 67.811,14.999 68.355,14.454 SW7.3 SW7.4
NetR34_2: R34.2 U16.2 | length 15.3
  Top Layer w0.5: U16.2 53.162,18.847 54.839,17.17 63.602,17.17 63.997,16.775 63.997,15.574 R34.2
NetR35_2: R35.2 U17.1 | length 3
  Top Layer w0.7: R35.2 U17.1
NetR37_1: R37.1 U10.8 U17.3 | length 31.2
  Top Layer w0.5: U10.8 64.177,25.362 65.748,25.362 v1(65.761,25.375)
  Top Layer w0.7: v1(72.009,46.761) 72.009,47.648 72.189,47.648 U17.3 ; U17.3@72.445,47.854 73.99,47.854 ; 73.965,47.879 R37.1
  Bottom Layer w0.5: v1(65.761,25.375) 65.786,25.349 68.301,25.349 72.009,29.058 v1(72.009,46.761)
NetR38_1: R38.1 SW8.3 SW8.4 | length 9.6
  Top Layer w1: R38.1 75.87,14.999 76.393,14.476 SW8.3 SW8.4
NetR38_2: R38.2 U18.2 | length 17.4
  Top Layer w0.5: U18.2 58.242,19.769 59.622,18.39 69.926,18.39 72.087,16.229 72.087,15.543 R38.2
RL1: "ESP32 DEVKIT V1.15" pad.7 U1.2 | length 76.4
  Top Layer w0.5: 23.012,45.796 23.089,45.72 v1(29.896,45.72) ; v1(61.316,85.09) U1.2
  Bottom Layer w0.5: v1(29.896,45.72) 29.896,79.197 35.789,85.09 v1(61.316,85.09)
RL2: "ESP32 DEVKIT V1.20" pad.31 U4.2 | length 37.7
  Top Layer w0.5: 48.412,55.956 pad.31 55.601,58.064 55.601,79.832 v1(55.575,79.858) ; v1(60.376,79.858) 60.43,79.858 60.501,79.787 63.407,79.787 U4.2
  Bottom Layer w0.5: v1(55.575,79.858) v1(60.376,79.858)
RL3: "ESP32 DEVKIT V1.19" pad.32 U6.2 | length 63.5
  Top Layer w0.5: v1(61.316,74.484) 61.328,74.471 63.407,74.471 U6.2
  Bottom Layer w0.5: pad.32 48.412,53.416 48.39,53.439 46.955,53.439 46.662,53.732 46.662,82.832 47.625,83.795 61.671,83.795 62.179,83.287 62.179,75.347 v1(61.316,74.484)
RL4: "ESP32 DEVKIT V1.10" pad.17 U8.2 | length 85.2
  Top Layer w0.5: 23.012,58.496 28.118,58.496 31.369,55.245 v1(31.369,45.618) ; v1(62.128,69.164) 62.139,69.153 63.409,69.153 U8.2
  Bottom Layer w0.5: pad.17 23.012,58.496 ; v1(31.369,45.618) 35.839,41.148 58.903,41.148 63.017,45.263 63.017,68.275 v1(62.128,69.164)
RL5: "ESP32 DEVKIT V1.9" pad.16 U11.2 | length 78.6
  Top Layer w0.5: 23.012,61.036 23.025,61.023 28.562,61.023 33.325,56.261 33.325,45.952 33.045,45.673 v1(33.045,45.618) ; v1(61.874,63.779) 61.898,63.803 63.396,63.803 U11.2
  Bottom Layer w0.5: pad.16 23.012,61.036 ; v1(33.045,45.618) 36.17,42.494 57.683,42.494 61.874,46.685 v1(61.874,63.779)
RL6: "ESP32 DEVKIT V1.8" pad.15 U13.2 | length 73.3
  Top Layer w0.5: 23.012,63.576 29.134,63.576 34.925,57.785 v1(34.925,45.644) ; v1(60.833,58.522) 60.838,58.516 63.414,58.516 U13.2
  Bottom Layer w0.5: pad.15 23.012,63.576 ; v1(34.925,45.644) 36.678,43.891 57.201,43.891 60.833,47.523 v1(60.833,58.522)
RL7: "ESP32 DEVKIT V1.23" pad.28 U15.2 | length 19.4
  Top Layer w0.5: v1(58.674,53.213) 58.683,53.204 63.411,53.204 U15.2
  Bottom Layer w0.5: pad.28 57.175,63.576 58.674,62.078 v1(58.674,53.213)
RL8: "ESP32 DEVKIT V1.24" pad.27 U17.2 | length 32.5
  Top Layer w0.5: v1(59.715,47.854) 59.728,47.866 63.407,47.866 U17.2
  Bottom Layer w0.5: 48.412,66.116 pad.27 58.42,66.116 59.715,64.821 v1(59.715,47.854)
SCL: "ESP32 DEVKIT V1.14" P7.2 pad.21 | length 45.8
  Bottom Layer w0.5: P7.2 12.116,85.512 14.834,82.794 14.834,57.074 16.383,55.524 16.383,49.163 17,48.547 17.722,48.547 pad.21 18.127,48.336 23.012,48.336
SDA: "ESP32 DEVKIT V1.11" P7.3 pad.18 | length 36.7
  Bottom Layer w0.5: P7.3 14.656,85.396 15.075,84.977 15.075,84.899 16.078,83.896 16.078,57.81 pad.18 23.012,55.956
VCC: C2.2 D5.2 D18.2 D23.2 D25.2 D26.2 D27.2 D34.2 D35.2 JDC1.1 K1.4 K2.4 K3.4 K4.4 K5.4 K6.4 K7.4 K8.4 LM2696.1 P10.2 R1.2 R2.2 R7.2 R15.2 R22.2 R30.2 R39.2 R40.2 U1.4 U4.4 U6.4 U8.4 U10.10 U11.4 U13.4 U15.4 U17.4 | length 426.2
  Top Layer w0.6: C2.2 70.917,21.501 71.442,22.027 71.452,22.027 72.107,22.682 v2(72.161,22.682) 72.2,22.72 72.2,22.815 73.464,24.079 U10.10
  Top Layer w1: U1.4 72.458,87.592 74.282,87.592 v1(74.295,87.579) ; U17.4@72.458,50.381 74.282,50.381 v1(74.295,50.368) ; U15.4@72.458,55.697 74.282,55.697 v1(74.295,55.684) 82.106,55.684 82.175,55.753 ; U13.4@72.458,61.012 74.282,61.012 v1(74.295,61) ; U11.4@72.458,66.328 74.282,66.328 v1(74.295,66.316) ; U8.4@72.458,71.644 74.282,71.644 v1(74.295,71.632) ; U6.4@72.458,76.96 74.282,76.96 v1(74.295,76.947) ; U4.4@72.458,82.276 74.282,82.276 v1(74.295,82.263) ; K1.4 82.175,55.753 ; D23.2 82.226,55.804 82.175,55.753 ; D18.2 94.194,37.16 94.245,37.109 ; K5.4 94.245,37.109 ; R2.2@98.728,52.771 98.728,55.829 ; K2.4 98.728,55.829 ; R2.2 99.187,49.936 99.212,49.911 ; D35.2 98.778,55.778 98.728,55.829 ; D5.2 110.724,37.16 ; K6.4 110.724,31.4 110.724,37.16 ; K3.4 115.28,55.626 ; D34.2 115.432,55.778 115.28,55.626 ; D25.2 127.336,37.16 127.361,37.186 ; K7.4 127.361,31.338 127.361,37.186 ; K4.4 131.893,61.731 131.893,55.753 ; D27.2 131.943,55.804 131.893,55.753 ; D26.2 143.922,37.16 143.998,37.236 ; K8.4 143.998,31.422 143.998,37.236 ; 82.175,55.753 82.175,52.94 82.804,52.311 R1.2 82.804,50.497 83.39,49.911 99.212,49.911 ; 94.245,37.109 94.245,40.337 93.929,40.653 94.191,40.915 94.191,42.502 95.021,43.332 110.592,43.332 ; 99.212,49.911 115.367,49.911 ; 110.592,43.332 127.305,43.332 ; 110.592,43.332 110.651,43.273 R30.2 110.724,40.643 110.724,37.16 ; 115.28,55.626 115.28,52.601 115.57,52.311 R7.2 115.57,50.114 115.367,49.911 ; 115.367,49.911 131.928,49.911 ; 127.305,43.332 143.508,43.332 144.094,43.918 ; 127.305,43.332 127.373,43.265 R39.2 127.361,40.705 127.361,37.186 ; 131.893,55.753 131.893,52.308 R15.2 131.953,49.936 131.928,49.911 ; 131.928,49.911 143.408,49.911 144.094,49.225 144.094,43.918 ; 143.998,37.236 143.998,40.62 R40.2 144.094,43.918
  Bottom Layer w1.5: P10.2 5.451,11.268 7.763,11.268 15.316,18.821 15.316,20.936 ; LM2696.1 10.769,31.115 13.632,28.253 13.632,25.871 JDC1.1 13.823,24.544 15.316,23.051 15.316,20.936 ; v1(74.295,87.579) v1(74.295,82.263) v1(74.295,76.947) v1(74.295,71.632) v1(74.295,66.316) v1(74.295,61) v1(74.295,55.684) v1(74.295,50.368) 74.295,36.551 74.295,24.816 v2(72.161,22.682) 70.415,20.936 15.316,20.936
  other v2: 72.847,23.317
pads on no net: "ESP32 DEVKIT V1.4" "ESP32 DEVKIT V1.6" "ESP32 DEVKIT V1.7" "ESP32 DEVKIT V1.12" "ESP32 DEVKIT V1.13" "ESP32 DEVKIT V1.16" "ESP32 DEVKIT V1.17" "ESP32 DEVKIT V1.18"

## Polygon pours and split planes (outlines as drawn)
GND on Bottom Layer "GND_L02_P000" (solid, pour order 0): -0.152,92.329 -0.127,92.354 151.816,92.354 151.816,0.025 151.841,0 -0.025,0
GND on Top Layer "GND_L01_P001" (solid, pour order 1): 0,92.405 0.051,92.354 151.867,92.354 151.867,0.025 151.841,0 0,0

## Keep-outs
Keep-Out Layer:
  the board outline again, w0.2

## Silkscreen, mask and mechanical layers (free items; w line width, h text height)
Top Overlay:
  lines w0.2: 16.459,44.348 19.38,44.348 19.38,82.855 16.459,82.855 16.459,44.348 ; 52.019,44.399 54.94,44.399 54.94,82.829 52.019,82.829 52.019,44.399
  text "5V SDA SCL GND" at 8.404,90.37 h0.8
  text "NC COM NO" at 131.135,89.657 h1.5
  text "NC COM NO" at 114.829,89.556 h1.5
  text "NC COM NO" at 81.809,89.53 h1.5
  text "NC COM NO" at 98.09,89.53 h1.5
  text "NO COM NC" at 114.981,1.951 h1.5
  text "NO COM NC" at 81.758,1.9 h1.5
  text "NO COM NC" at 131.72,1.849 h1.5
  text "NO COM NC" at 98.344,1.748 h1.5